# Altium PCB STM32_BluePill.PcbDoc (part 2 of 2)
Units mm, origin at the board's own origin, x right, y up, seen from the top; angles counter-clockwise.
Board outline 53 x 23 mm, 2 copper layers (Top Layer, Bottom Layer), stack 1.569 mm thick; 35 components, 50 nets, 176 pads, 44 vias.
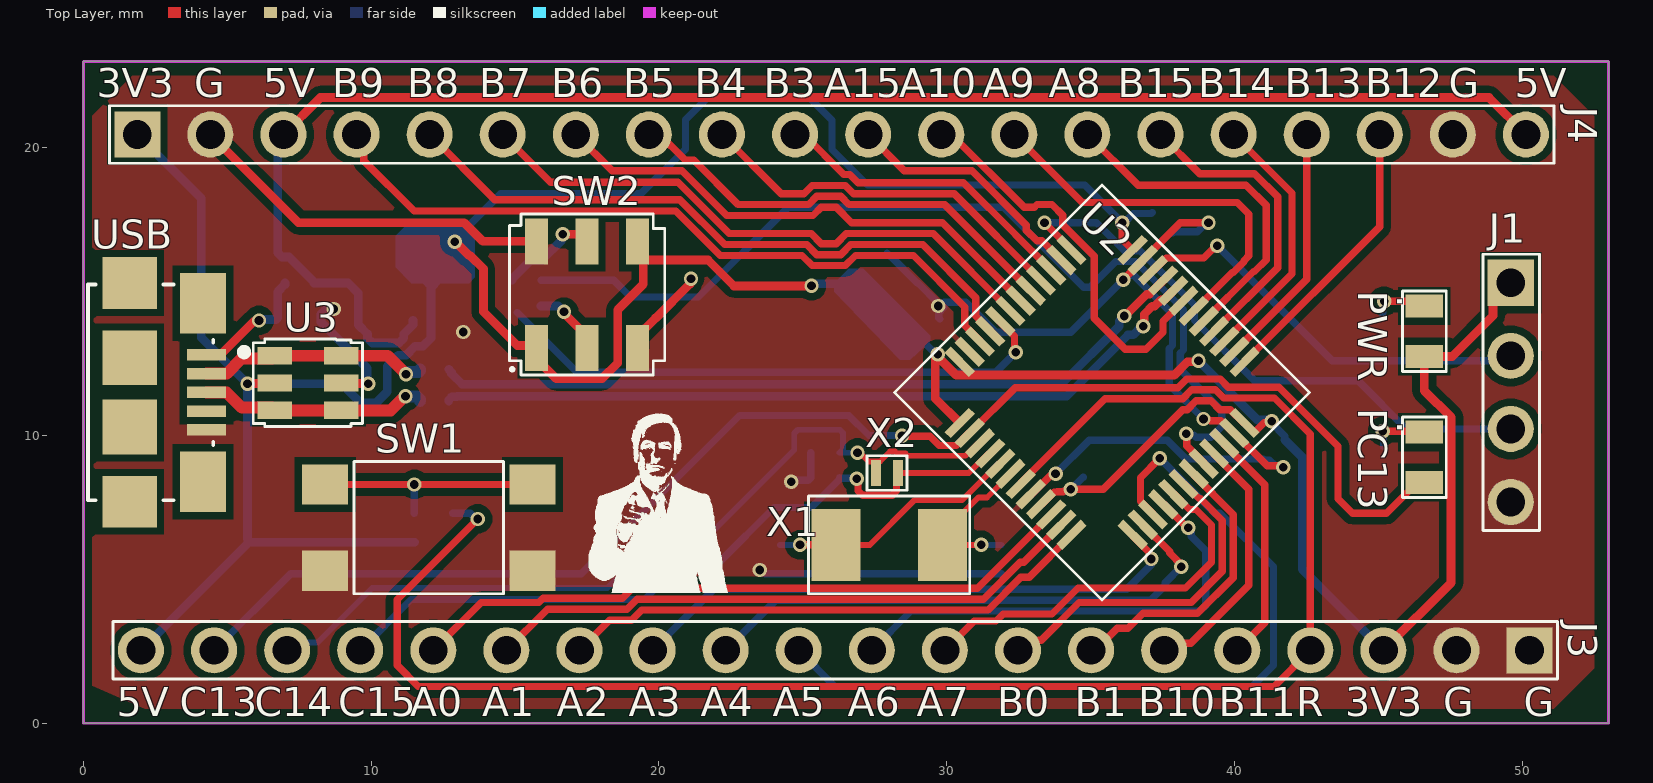
[diagram p0: Top Layer view]

## Via types
v1: diameter 0.5, hole 0.3, Top Layer to Bottom Layer, tented both sides, 44 vias

## Nets (pads, with @x,y where several pads share a name; then routed paths per layer and width w, separated by ;. In a path a pad name is that pad's centre, name@x,y a point inside that pad or via, vN(x,y) a via of type N, cw(c..) or ccw(c..) an arc to the next point about the centre after c; other vN are vias at no path point) (continued)
PC13: J3.19 PC13.2 U2.2 | length 50.3
  Top Layer w0.254: v1(28.444,9.999) 28.466,9.978 29.422,9.978 29.745,9.655 30.341,9.655 30.771,10.086 U2.2 32.38,11.662 38.041,11.662 38.348,11.968 39.502,11.968 39.786,11.684 41.547,11.684 43.6,9.631 43.6,7.8 44.1,7.3 45.283,7.3 46.35,8.367 PC13.2
  Bottom Layer w0.254: J3.19 7.2,5.2 17.3,5.2 22.8,10.7 26.6,10.7 27.301,9.999 v1(28.444,9.999)
RESET: C15.2 J3.4 U2.7 | length 59.4
  Top Layer w0.254: v1(13.7,7.1) 10.9,4.3 10.9,2.017 11.636,1.28 41.38,1.28 J3.4 42.637,10.055 41.39,11.303 39.628,11.303 39.344,11.587 38.505,11.587 38.199,11.281 35.502,11.281 32.572,8.351 U2.7
  Bottom Layer w0.254: C15.2 13.438,7.3 13.638,7.1 v1(13.7,7.1)
SWCLK: J1.3 U2.37 | length 20.8
  Top Layer w0.254: v1(33.4,17.4) 33.4,17.395 34.339,16.455 U2.37
  Bottom Layer w0.254: v1(33.4,17.4) 35.208,17.4 36.18,16.427 36.719,16.427 38.61,14.536 38.61,13.997 40.708,11.9 44.3,11.9 45.97,10.23 J1.3
SWDIO: J1.2 U2.34 | length 14.5
  Top Layer w0.254: U2.34 37.2,15.743 37.631,16.173 38.934,16.173 39.361,16.6 v1(39.4,16.6)
  Bottom Layer w0.254: v1(39.4,16.6) 43.404,12.596 49.429,12.596 J1.2
USB_N: R1.1 U3.1 U3.6 USB.3 | length 8
  Top Layer w0.411: USB.3 4.286,11.494 4.981,11.494 5.506,10.969 6.556,10.969 U3.6 10.681,10.875 11.167,11.361 v1(11.191,11.361)
  Bottom Layer w0.411: v1(11.191,11.361) 11.589,11.361 11.7,11.25 R1.1
USB_P: R2.2 U3.3 U3.4 USB.2 | length 8
  Top Layer w0.411: USB.2 4.286,12.156 4.981,12.156 5.506,12.681 6.556,12.681 U3.4 10.567,12.775 v1(11.21,12.132)
  Bottom Layer w0.411: v1(11.21,12.132) 11.234,12.132 11.307,12.206 11.646,12.206 11.691,12.25 R2.2
VBUS: C3.2 FB1.1 USB.1 | length 4.3
  Top Layer w0.305: USB.1 4.755,12.8 5.918,13.963 6.063,13.963 v1(6.1,14)
  Bottom Layer w0.305: v1(6.1,14) 6.137,14.037 6.687,14.037 C3.2 6.75,15 7,15.25 FB1.1
pads on no net: U1.4 USB.4 USB.6

## Polygon pours and split planes (outlines as drawn)
GND on Top Layer "GND_L01_P001" (solid, remove dead copper, pour order 1): 2.125,0.5 51.093,0.5 52.5,1.907 52.5,21.1 51.1,22.5 1.7,22.5 0.3,21.1 0.3,1.311
GND on Bottom Layer "GND_L02_P000" (solid, remove dead copper, pour order 0): 2.125,0.5 51.093,0.5 52.5,1.907 52.5,21.1 51.1,22.5 1.7,22.5 0.3,21.1 0.3,1.311

## Keep-outs
Keep-Out Layer:
  the board outline again, w0.1

## Other copper
Bottom Layer:
  region net 3V3: 26.1,15.3 26.6,15.8 27.1,15.8 29.431,13.469 29.431,13.271 28.737,12.631 28.362,12.631 26.1,15
  region net 3V3: 11.748,15.328 11.983,15.093 12.212,15.093 12.218,15.087 12.423,15.292 12.423,15.336 12.13,15.336 12.023,15.443
  region net 3V3: 11.3,17.4 13,17.4 13.6,16.8 13.6,15.5 13.604,15.496 13.408,15.3 11.392,15.3 10.846,15.846 10.846,16.946

## Silkscreen, mask and mechanical layers (free items; w line width, h text height)
Top Overlay:
  drawing of 2159 lines, arcs and shapes, not listed
  text "3V3" at 0.453,21.753 h1
  text "G" at 3.853,21.753 h1
  text "5V" at 6.253,21.753 h1
  text "B9" at 8.65,21.75 h1
  text "B8" at 11.25,21.75 h1
  text "B7" at 13.75,21.75 h1
  text "B6" at 16.25,21.75 h1
  text "B5" at 18.75,21.75 h1
  text "B4" at 21.25,21.75 h1
  text "B3" at 23.65,21.75 h1
  text "A15" at 25.75,21.75 h1
  text "A10" at 28.35,21.75 h1
  text "A9" at 31.25,21.75 h1
  text "A8" at 33.55,21.75 h1
  text "B15" at 35.95,21.75 h1
  text "B14" at 38.75,21.75 h1
  text "B13" at 41.75,21.75 h1
  text "B12" at 44.55,21.75 h1
  text "G" at 47.45,21.75 h1
  text "5V" at 49.75,21.75 h1
  text "5V" at 1.153,0.253 h1
  text "C13" at 3.353,0.253 h1
  text "C14" at 5.953,0.253 h1
  text "C15" at 8.853,0.253 h1
  text "A0" at 11.353,0.253 h1
  text "A1" at 13.853,0.253 h1
  text "A2" at 16.453,0.253 h1
  text "A3" at 18.953,0.253 h1
  text "A4" at 21.453,0.253 h1
  text "A5" at 23.953,0.253 h1
  text "A6" at 26.553,0.253 h1
  text "A7" at 28.953,0.253 h1
  text "B0" at 31.753,0.253 h1
  text "B1" at 34.453,0.253 h1
  text "B10" at 36.653,0.253 h1
  text "B11" at 39.453,0.253 h1
  text "R" at 42.153,0.253 h1
  text "3V3" at 43.853,0.253 h1
  text "G" at 47.253,0.253 h1
  text "G" at 50.053,0.253 h1
Bottom Overlay:
  text "3V3" at 52.247,16.847 h1 r90
  text "DIO" at 52.247,13.847 h1 r90
  text "CLK" at 52.247,11.147 h1 r90
  text "G" at 52.247,7.847 h1 r90

## Text inside footprints (layer, text, board x,y; h text height)
USB: Mechanical 13 "PCB Edge" at 0.376,6.295 h1 r270